# Altium PCB PCB1.PcbDoc
Units mil, origin at the board's own origin, x right, y up, seen from the top; angles counter-clockwise.
Board outline 6000 x 4000 mil, 2 copper layers (Top Layer, Bottom Layer); 66 components, 77 nets, 224 pads, 0 vias.
Unrouted connection lines stored in the file: 147.
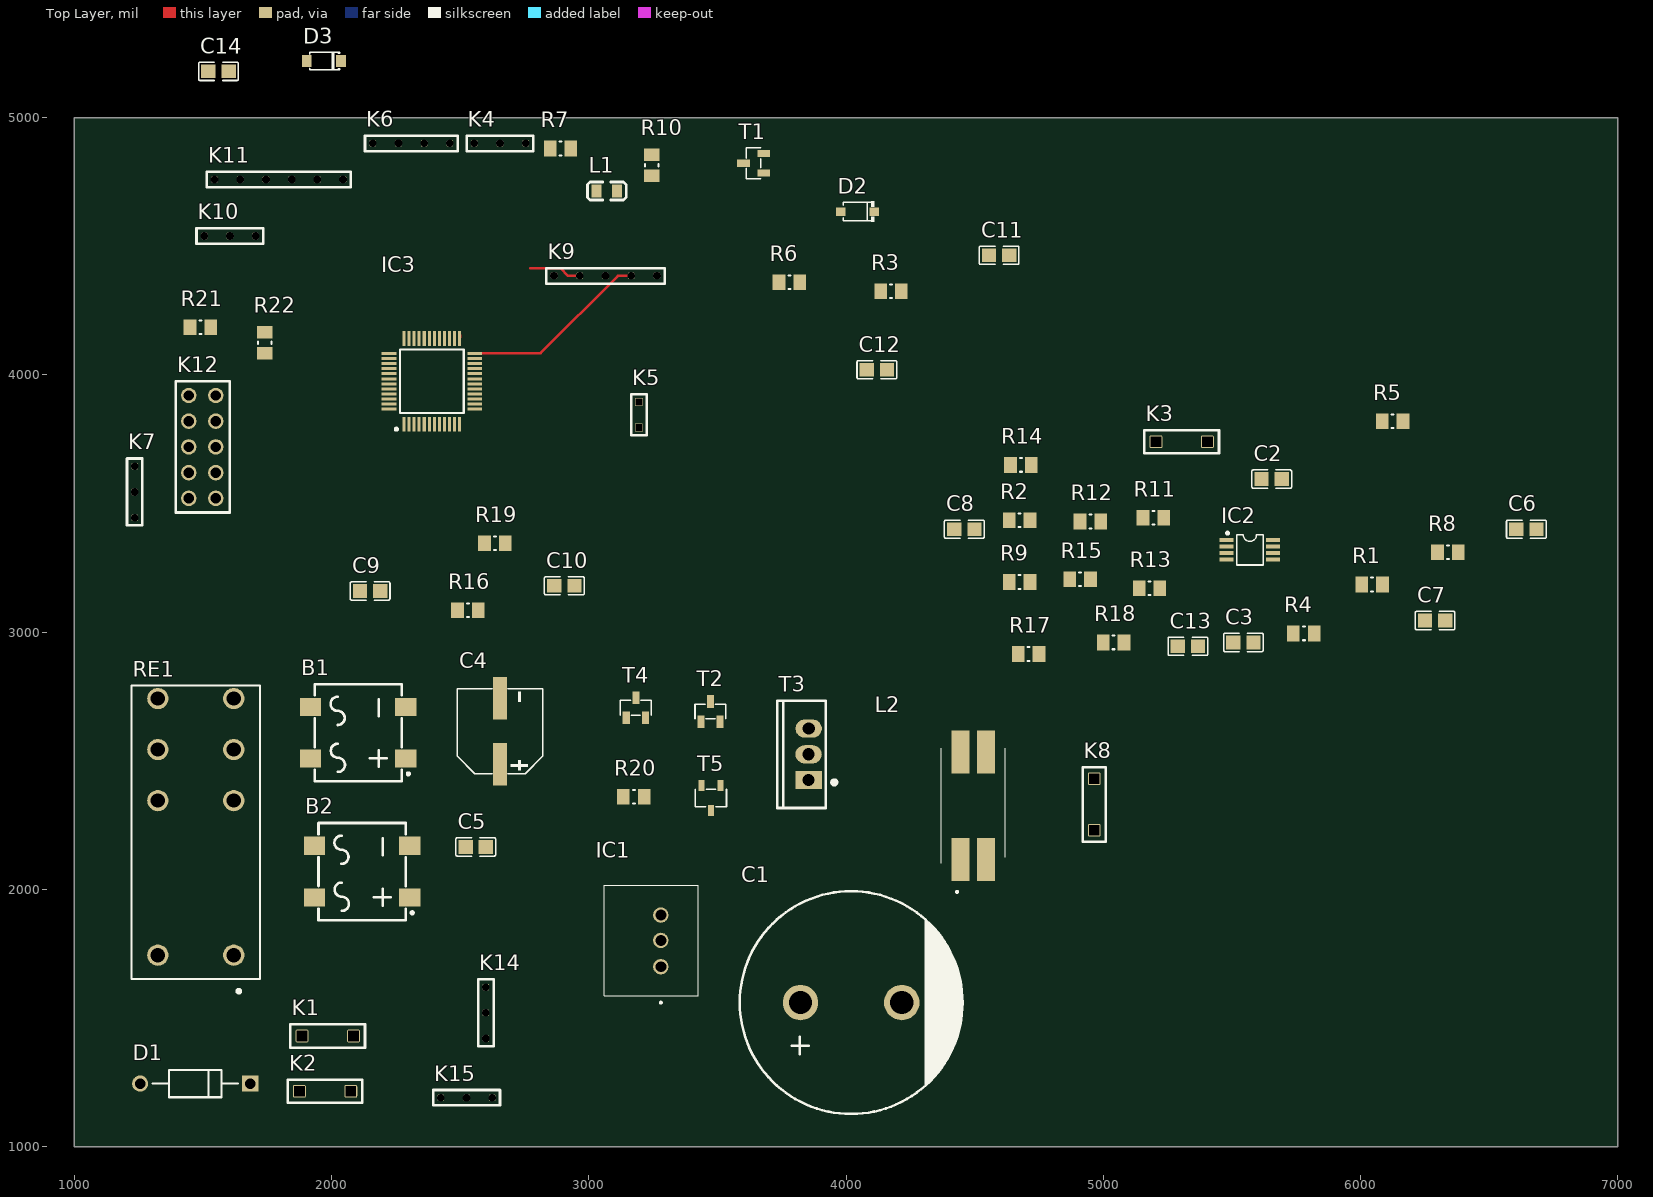
[diagram p0: Top Layer view]
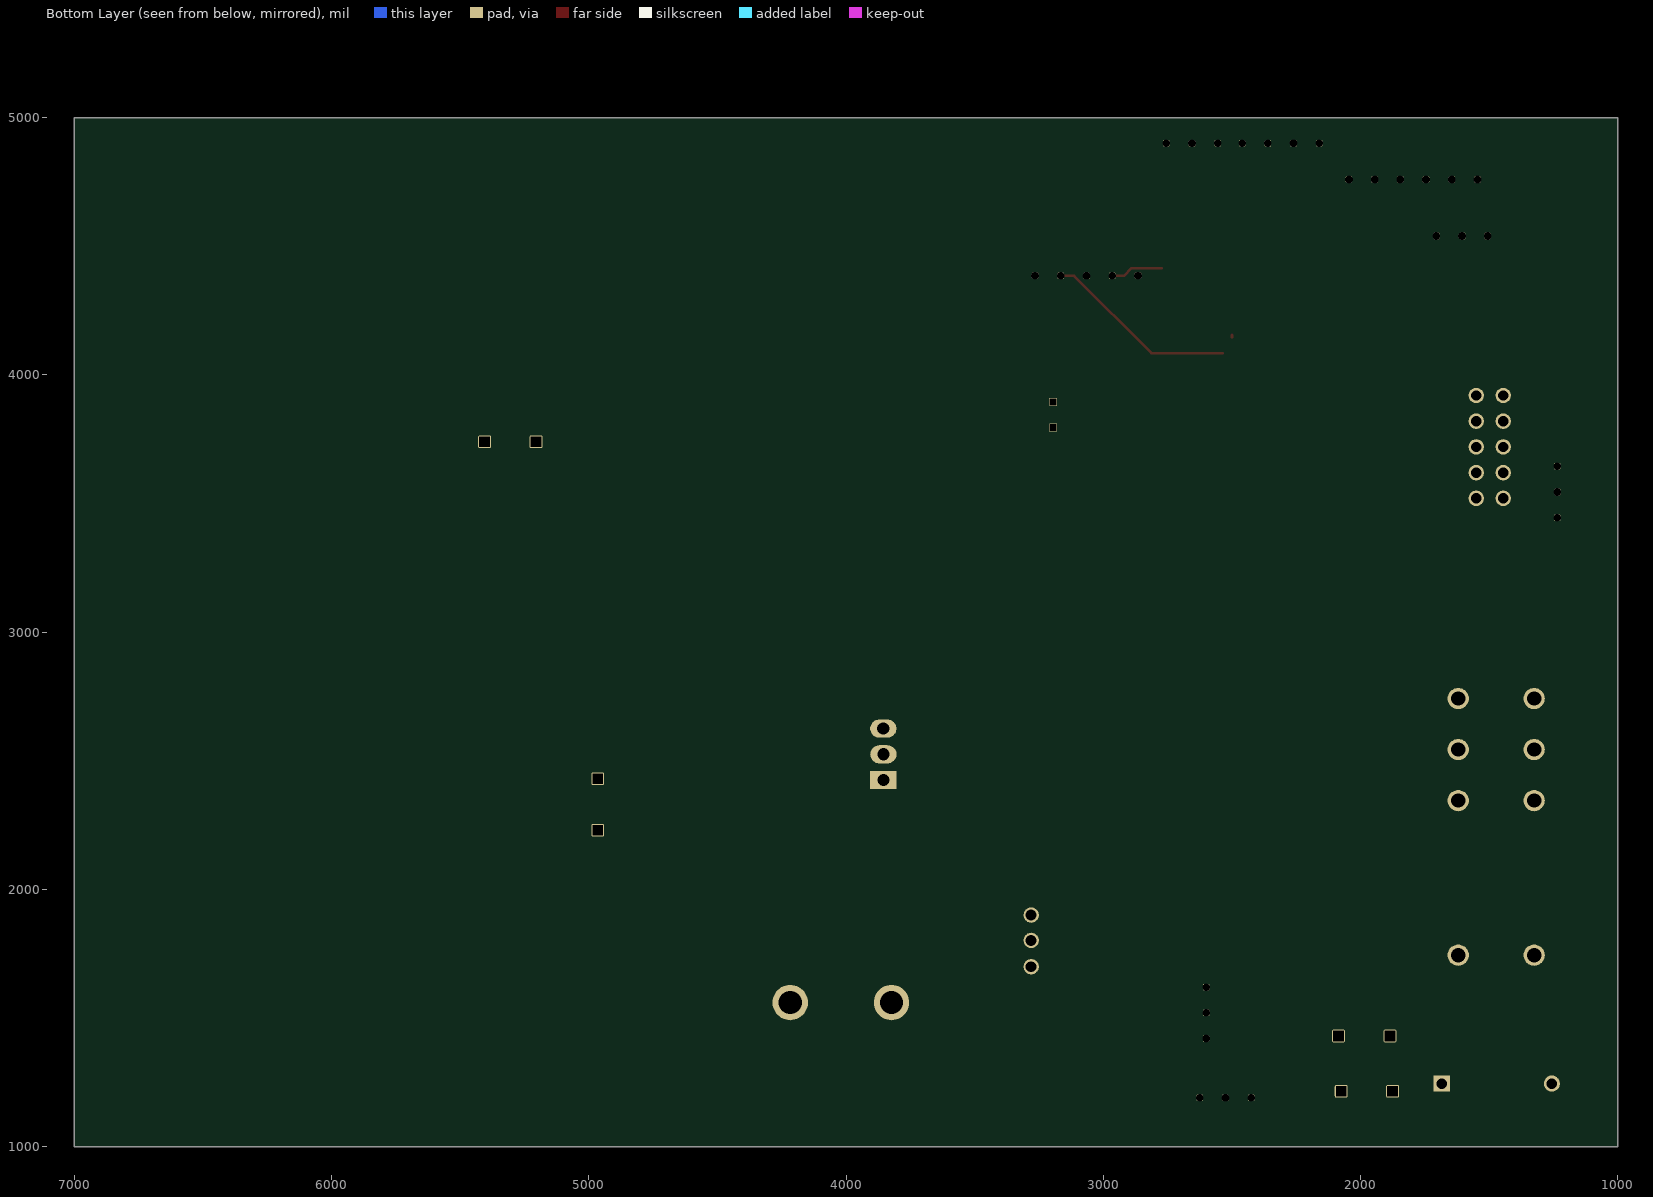
[diagram p1: Bottom Layer view, seen from below]

## Layer stack, top to bottom
Top Solder: solder mask 0.4, Solder Resist, Dk 3.5
Top Layer: signal copper 1.4
Dielectric 1: dielectric 12.6, FR-4, Dk 4.8
Bottom Layer: signal copper 1.4
Bottom Solder: solder mask 0.4, Solder Resist, Dk 3.5

## Board outline
1000,1000 7000,1000 7000,5000 1000,5000

## Design rules (kind name [scope] priority, off if disabled: settings)
Clearance [All] p1: gap=10 ignorepadtopadclearanceinfootprint=FALSE except(0: Arc-Hole Track-Hole SMDPad-Hole THPad-Hole Via-Hole Fill-Hole Poly-Hole Region-Hole Text-Hole)
PolygonConnect [All] p1: connectstyle=Relief reliefconductorwidth=10 reliefentries=4 polygonreliefangle="90 Angle" airgapwidth=10
RoutingVias [All] p1: holewidth=28 width=50 viastyle="Through Hole" minholewidth=28 minwidth=50 maxholewidth=28 maxwidth=50
SolderMaskExpansion [All] p1: expansion=4 istentingtop=FALSE
Width [All] p1: maxlimit=10 minlimit=10 preferedwidth=10
30 further rules are at their usual default settings.

## Classes and differential pairs
component class Voeding: B1 B2 C1 C4 C5 D1 D2 IC1 K1 K2 K14 K15 R3 R6 RE1
component class Thermokoppel: C6 C7 C12 C13 IC2 K3 R1 R2 R4 R5 R8 R9 R11 R12 R13 R14 R15
component class PWMSoldeerbout: K8 L2 R17 R18 R20 T2 T3 T4 T5
component class Microcontroller: C2 C3 C8 C9 C10 C11 C14 D3 IC3 K4 K5 K6 K7 K9 K10 K11 K12 L1 R7 R10 R16 R19 R21 R22 T1

## Components (designator, comment, footprint, x,y, rotation, side; value= is the part's Value field where it differs from the comment)
B1 "TTR8MF" "B1,2 Brug gelijkrichter" 2115,2605 r90 top
B2 "TTR8MF" "B1,2 Brug gelijkrichter" 2130,2065 r90 top
C1 "4700uF" "C1 4700uF" 4020,1560 r0 top
C2 "10uF" "C2,5,10 10uF" 5655,3595 r0 top
C3 "100nF" "C6,7,12,13 10nF" 5545,2960 r0 top
C4 "100uF" "C4 100uF" 2655,2615 r90 top
C5 "10uF" "C2,5,10 10uF" 2560.63,2165 r0 top
C6 "10nF" "C6,7,12,13 10nF" 6645,3400 r0 top
C7 "10nF" "C6,7,12,13 10nF" 6290,3045 r0 top
C8 "100nF" "C6,7,12,13 10nF" 4460,3400 r0 top
C9 "100nF" "C6,7,12,13 10nF" 2150,3160 r0 top
C10 "10uF" "C2,5,10 10uF" 2905,3180 r180 top
C11 "100nF" "C6,7,12,13 10nF" 4595,4465 r0 top
C12 "10nF" "C6,7,12,13 10nF" 4120,4020 r0 top
C13 "10nF" "C6,7,12,13 10nF" 5329.37,2945 r180 top
C14 "100nF" "C6,7,12,13 10nF" 1560.63,5180 r0 top
D1 "1N4007" FP-1N4007-MFG 1470,1245 r180 top value=15pF
D2 "" "D2 zener diode" 4045,4635 r180 top
D3 "1N4148" "D3 1N14148" 1970,5220 r180 top
IC1 "" "IC1 DC-DC converter" 3280,1699.21 r90 top
IC2 "" "IC2 opamps" 5570,3320 r270 top
IC3 "ATMEGA4809-AU" "IC3 ATMEGA4809-AU" 2390,3975 r90 top
K1 "" Terminal_2 1895,1365 r0 top
K2 "" Terminal_2 2065,1280 r180 top
K3 "" Terminal_2 5215,3675 r0 top
K4 "" PInHeader_3 2565,4835 r0 top
K5 "" PInHeader_2 3260,3805 r90 top
K6 "" PInHeader_4 2450,4965 r180 top
K7 "" PInHeader_3 1300,3455 r90 top
K8 "" Terminal_2 5030,2240 r90 top
K9 "" PInHeader_5 2875,4320 r0 top
K10 "" PInHeader_3 1695,4605 r180 top
K11 "K PinHeaer_6" PInHeader_6 2035,4825 r180 top
K12 "" BOxHeader_10 1460,3565 r90 top
K14 "" PInHeader_3 2665,1430 r90 top
K15 "" PInHeader_3 2435,1125 r0 top
L1 "10uH" "L2 SmoorSpoel" 3070,4715 r0 top
L2 "" "L1 Smoorspoel" 4495,2325 r0 top
R1 "18K" RESC2013X50X30ML20T20 6045,3185 r0 top
R2 "1M" RESC2013X50X30ML20T20 4675,3435 r0 top
R3 "68K" RESC2013X50X30ML20T20 4175,4325 r0 top
R4 "5K6" RESC2013X50X30ML20T20 5779.65,2995 r180 top
R5 "5K6" RESC2013X50X30ML20T20 6125,3820 r0 top
R6 "10K" RESC2013X50X30ML20T20 3780,4360 r180 top
R7 "10K" RESC2013X50X30ML20T20 2890,4880 r0 top
R8 "100" RESC2013X50X30ML20T20 6340,3310 r0 top
R9 "10M" RESC2013X50X30ML20T20 4674.65,3195 r0 top
R10 "4K7" RESC2013X50X30ML20T20 3245,4815 r90 top
R11 "18K" RESC2013X50X30ML20T20 5195,3445 r0 top
R12 "18K" RESC2013X50X30ML20T20 4950,3430 r0 top
R13 "5K6" RESC2013X50X30ML20T20 5180,3170 r0 top
R14 "5K6" RESC2013X50X30ML20T20 4679.65,3650 r0 top
R15 "100" RESC2013X50X30ML20T20 4910,3205 r0 top
R16 "4K7" RESC2013X50X30ML20T20 2530,3085 r0 top
R17 "4K7" RESC2013X50X30ML20T20 4710,2915 r0 top
R18 "100" RESC2013X50X30ML20T20 5040.35,2960 r180 top
R19 "10K" RESC2013X50X30ML20T20 2635,3345 r0 top
R20 "4K7" RESC2013X50X30ML20T20 3175,2360 r180 top
R21 "4K7" RESC2013X50X30ML20T20 1490,4185 r0 top
R22 "4K7" RESC2013X50X30ML20T20 1740,4125 r270 top
RE1 "" "RE1 Vermogen relais" 1472.36,1744.21 r90 top
T1 "BC847C" "T1,2,4 Bipolar Transistors" 3646.91,4819.61 r0 top
T2 "BC847" "T1,2,4 Bipolar Transistors" 3470,2685 r270 top
T3 "IRF9Z34NPBF" "T3 MOSFET-P" 3854.8,2525 r90 top
T4 "BC847" "T1,2,4 Bipolar Transistors" 3180,2700 r270 top
T5 "BC857" "T5 Bipolar Transistors" 3475,2355 r90 top

## Footprints (in the part's own frame and the unit in brackets; to place one, negate y for a bottom-side part, rotate by r counter-clockwise, add the part's x,y. Pads: shape width x height; smd on the part's side, far side on the other; paste and mask are expansions set on the pad)
"B1,2 Brug gelijkrichter" [mm]
  rect 1.8x2.1 smd: 1(-2.449,-4.411) 2(2.651,-4.411) 3(2.651,4.989) 4(-2.449,4.989)
  silkscreen extent -4.7,-4.79 4.9,4.59
BOxHeader_10 [mil]
  round 60 hole 40: 1(-45,-90) 2(-45,15) 3(55,-90) 4(55,15) 5(155,-90) 6(155,15) 7(255,-90) 8(255,15) 9(355,-90) 10(355,15)
  silkscreen extent -100,-145 410,65
"C1 4700uF" [mm] "CAP-TH_BD22.0-P10.00-D2.3-FD"
  round 3.5 hole 2.3: 1(-5,0) 2(5,0)
  silkscreen extent -11,-11 11,11
"C2,5,10 10uF" [mm] "C0805"
  rect 1.41x1.35 smd: 1(-1,0) 2(1,0)
  silkscreen extent -1.96,-0.9 1.96,0.9
"C4 100uF" [mm]
  rect 4.2x1.4 smd: 1(-3.267,0) 2(3.267,0)
  silkscreen extent -4.2,-4.23 4.2,4.23
"C6,7,12,13 10nF" [mm] "C0805"
  rect 1.41x1.35 smd: 1(-1,0) 2(1,0)
  silkscreen extent -1.96,-0.9 1.96,0.9
"D2 zener diode" [mm] "SOD-123_L2.7-W1.7-LS3.8-RD"
  rect 0.91x0.84 smd: 1(-1.655,0) 2(1.655,0)
  silkscreen extent -1.65,-1 1.43,1
"D3 1N14148" [mm] "SOD-123_L2.8-W1.8-LS3.7-RD"
  rect 0.95x1.15 smd: 1(-1.693,0) 2(1.693,0)
  silkscreen extent -1.58,-0.87 1.41,0.87
FP-1N4007-MFG [mm]
  rect 1.6x1.6 hole 1.05 paste-1000 mask+0: 1(-5.438,0)
  round 1.6 hole 1.05 paste-1000 mask+0: 2(5.438,0)
  silkscreen extent -4.24,-1.35 4.24,1.35, body extent -6.34,-1.45 6.34,1.45, height 0.25
"IC1 DC-DC converter" [mm] "OKI78SR515W36C"
  round 1.519 hole 1.08: 1(0,0) 2(2.6,0) 3(5.1,0)
  silkscreen extent -3.6,-3.7 8.05,5.6, body extent -10,-3.38 10,3.38, height 5.8
"IC2 opamps" [mil] "MSOP-8_L3.0-W3.0-P0.65-LS4.9-BL MCP6002-E/MS"
  rect 15.98x55 smd: 1(-38.39,-90.55) 2(-12.8,-90.55) 3(12.8,-90.55) 4(38.39,-90.55) 5(38.39,90.56) 6(12.8,90.56) 7(-12.8,90.55) 8(-38.39,90.55)
  silkscreen extent -70,-91 59,51
"IC3 ATMEGA4809-AU" [mm] "QFP50P900X900X120-48N"
  rect 1.475x0.3 smd: 1(-4.238,2.75) 2(-4.238,2.25) 3(-4.238,1.75) 4(-4.238,1.25) 5(-4.238,0.75) 6(-4.238,0.25) 7(-4.238,-0.25) 8(-4.238,-0.75) 9(-4.238,-1.25) 10(-4.238,-1.75) 11(-4.238,-2.25) 12(-4.238,-2.75) 25(4.238,-2.75) 26(4.238,-2.25) 27(4.238,-1.75) 28(4.238,-1.25) 29(4.238,-0.75) 30(4.238,-0.25) 31(4.238,0.25) 32(4.238,0.75) 33(4.238,1.25) 34(4.238,1.75) 35(4.238,2.25) 36(4.238,2.75)
  rect 0.3x1.475 smd: 13(-2.75,-4.238) 14(-2.25,-4.238) 15(-1.75,-4.238) 16(-1.25,-4.238) 17(-0.75,-4.238) 18(-0.25,-4.238) 19(0.25,-4.238) 20(0.75,-4.238) 21(1.25,-4.238) 22(1.75,-4.238) 23(2.25,-4.238) 24(2.75,-4.238) 37(2.75,4.238) 38(2.25,4.238) 39(1.75,4.238) 40(1.25,4.238) 41(0.75,4.238) 42(0.25,4.238) 43(-0.25,4.238) 44(-0.75,4.238) 45(-1.25,4.238) 46(-1.75,4.238) 47(-2.25,4.238) 48(-2.75,4.238)
  silkscreen extent -4.85,-3.15 3.15,3.62, body extent -10,-3.38 10,3.38, height 5.8
"L1 Smoorspoel" [mm]
  rect 1.78x4.27 smd: 1(-1.27,-5.305) 2(1.27,-5.305) 3(1.27,5.305) 4(-1.27,5.305)
  silkscreen extent -3.15,-8.6 3.15,5.69, body extent -10,-3.38 10,3.38, height 5.8
"L2 SmoorSpoel" [mm]
  rect 1x1.25 smd: 1(-1,0) 2(1,0)
  silkscreen extent -1.91,-0.89 1.91,0.89
PInHeader_2 [mil]
  rrect25% 32x32 hole 26 square: 1(-10,65) 2(90,65)
  silkscreen extent -40,35 120,95
PInHeader_3 [mil]
  rrect50% 26x26 hole 30: 1(-10,65) 2(90,65) 3(190,65)
  silkscreen extent -40,35 220,95
PInHeader_4 [mil]
  rrect50% 26x26 hole 30: 1(-10,65) 2(90,65) 3(190,65) 4(290,65)
  silkscreen extent -40,35 320,95
PInHeader_5 [mil]
  rrect50% 26x26 hole 30: 1(-10,65) 2(90,65) 3(190,65) 4(290,65) 5(390,65)
  silkscreen extent -40,35 420,95
PInHeader_6 [mil]
  rrect50% 26x26 hole 30: 1(-10,65) 2(90,65) 3(190,65) 4(290,65) 5(390,65) 6(490,65)
  silkscreen extent -40,35 520,95
"RE1 Vermogen relais" [mm] "RT42"
  round 2.1 hole 1.4: 1(0,-3.75) 2(15.26,-3.75) 3(20.3,-3.75) 4(25.34,-3.75) 5(25.34,3.75) 6(20.3,3.75) 7(15.26,3.75) 8(0,3.75)
  silkscreen extent -3.67,-6.35 26.65,6.35, body extent -10,-3.38 10,3.38, height 5.8
RESC2013X50X30ML20T20 [mm] "Chip Resistor, 2-Leads, Body 2.00x1.25mm, IPC Low Density"
  rect 1.25x1.55 smd: 1(-1.025,0) 2(1.025,0)
  silkscreen extent -0.1,-0.67 0.1,0.67, body extent -1.1,-0.72 1.1,0.72, height 0.5
"T1,2,4 Bipolar Transistors" [mm] "BC847C"
  rect 1.25x0.7 smd: 1(0.847,-0.872) 2(0.847,1.028) 3(-1.153,0.078)
  silkscreen extent -0.88,-1.45 0.57,1.6
"T3 MOSFET-P" [mm] "TO-220-3_L10.0-W4.5-P2.54-L"
  rect 1.8x2.6 hole 1.2: 1(-2.54,0.005)
  oval 1.8x2.6 hole 1.2: 2(0,0.005) 3(2.54,-0.005)
  silkscreen extent -5.3,-2.73 5.3,3.09
"T5 Bipolar Transistors" [mm] "SOT-23-3_L2.9-W1.6-P1.90-LS2.8-BR"
  rect 1.07x0.6 smd: 1(1.235,-0.95) 2(1.235,0.95) 3(-1.235,0)
  silkscreen extent -0.88,-1.54 0.88,1.54
Terminal_2 [mil]
  rrect25% 50x50 hole 40 square: 1(-10,65) 2(190,65)
  silkscreen extent -55,20 235,110

## Part data
B1 B2: library part "B1,2 Brug Gelijkrichter", BOM_JLCPCB Part Class="Extended Part", BOM_Manufacturer=MDD, BOM_Manufacturer Part=TTR8MF, BOM_Supplier=LCSC, BOM_Supplier Part=C712546, Contributor=LCSC, spicePre=D, spiceSymbolName=TTR8MF
C1: library part "C1 4700uF", BOM_JLCPCB Part Class="Extended Part", BOM_Manufacturer=CX(承兴), BOM_Manufacturer Part=KM478M050N35RR0VH2FP0, BOM_Supplier=LCSC, BOM_Supplier Part=C45662, nameAlias=Capacitance, spicePre=C, spiceSymbolName="4700uF 50V 22*35"
C2 C5 C10: library part "C2,5,10 10uF", BOM_JLCPCB Part Class="Basic Part", BOM_Manufacturer=muRata(村田), BOM_Manufacturer Part=GRM21BR61H106KE43L, BOM_Supplier=LCSC, BOM_Supplier Part=C440198, Contributor=LCSC, nameAlias=Capacitance, spicePre=C, spiceSymbolName=GRM21BR61H106KE43L
C3 C14: library part "C 100nF"
C4: library part "C4 100uF", BOM_JLCPCB Part Class="Extended Part", BOM_Manufacturer=Nichicon(尼吉康), BOM_Manufacturer Part=UWT1H101MNL1GS, BOM_Supplier=LCSC, BOM_Supplier Part=C445063, Contributor=LCSC, nameAlias=Capacitance, spicePre=C, spiceSymbolName=UWT1H101MNL1GS
C6 C7 C8 C9 C11 C12 C13: library part "C6,7,12,13 10nF", BOM_JLCPCB Part Class="Extended Part", BOM_Manufacturer=CCTC(三环), BOM_Manufacturer Part=TCC0805X7R103M500DT, BOM_Supplier=LCSC, BOM_Supplier Part=C376921, Contributor=LCSC, nameAlias=Capacitance, spicePre=C, spiceSymbolName=TCC0805X7R103M500DT
D1: library part zo_1N4007, "DIODE GEN PURP 1KV 1A DO204AL", Capacitance=15pF, Forward Current=1A, Manufacturer=Vishay, Manufacturer Part Number=1N4007-E3/54, Max Junction Temp=+150°C, Max Repetitive Reverse Voltage=1000V, Max Surge Forward Current=30A, Peak Reverse Current=30uA, Temperature="-50°C to +150°C", Temperature Range Low=-50°C, Automotive=No, Category=Diode, ComponentLink2Description=Datasheet, ComponentLink2URL=http://www.vishay.com/docs/88503/1n4001.pdf, Device Class L1="Discrete Semiconductors", Device Class L2=Diodes, Device Class L3="Rectifier Diodes", Digikey Description="DIODE GEN PURP 1KV 1A DO204AL", Height=2.7mm, Ipc Land Pattern Name=DIOPA1088W105L520D270, Lead Free=Yes, Mouser Description="Rectifiers Vr/1000V Io/1A", Octopart=https://octopart.com/1n4007-e3%2F54-vishay-39548207, Package=1N4007, RoHS=TRUE, Temperature Range High=+150°C
D2: library part "D2 zener diode", "BZT52C5V1_C1884555", BOM_JLCPCB Part Class="Extended Part", BOM_Manufacturer=YFW(佑风微), BOM_Manufacturer Part=BZT52C5V1, BOM_Supplier=LCSC, BOM_Supplier Part=C1884555, Contributor=LCSC, spicePre=D, spiceSymbolName=BZT52C5V1_C1884555
D3: library part "D3 1N14148", "1N4148W-C84367", BOM_JLCPCB Part Class="Extended Part", BOM_Manufacturer=MDD, BOM_Manufacturer Part=1N4148W, BOM_Supplier=LCSC, BOM_Supplier Part=C84367, spicePre=D, spiceSymbolName=1N4148W-C84367
IC1: library part "IC1 OKI-78SR-5_1.5-W36-C", "Non-Isolated DC/DC Converters 7.5W 24Vin 5Vout1 1.5A SIP Non-Iso", Manufacturer_Name="Murata Electronics", Manufacturer_Part_Number=OKI-78SR-5/1.5-W36-C, Mouser Part Number=580-OKI78SR5/1.5W36C, Datasheet Link=https://www.murata.com/products/productdata/8807037992990/oki-78sr.pdf?1583754815000, Geometry.Height=16.5mm, Mouser Price/Stock=https://www.mouser.co.uk/ProductDetail/Murata-Power-Solutions/OKI-78SR-5-1.5-W36-C?qs=uJpRT2lXVNXJP%252Bo08dQqJQ%3D%3D
IC2: library part "IC2 dual opamps", "IC2 dual opamps"
IC3: library part "IC3 ATMEGA4809-AU", "8-bit Microcontrollers - MCU 20MHz, 48KB, TQFP", Manufacturer_Name=Microchip, Mouser Part Number=556-ATMEGA4809-AU, Geometry.Height=1.2mm, Manufacturer_Part_Number=ATMEGA4809-AU, Mouser Price/Stock=https://www.mouser.co.uk/ProductDetail/Microchip-Technology-Atmel/ATMEGA4809-AU?qs=P1JMDcb91o4zLIorxO9tIg%3D%3D
K1 K2 K3 K8: library part "K Terminal_2"
K4 K7 K10 K14 K15: library part "K PinHeader_3"
K5: library part "K PinHeader_2"
K6: library part "K PinHeader_4"
K9: library part "K PinHeader_5"
K11: library part "K PinHeader_6"
K12: library part "K Boxheader_10"
L1: library part "L2 smoorspoel", BOM_JLCPCB Part Class="Extended Part", BOM_Manufacturer=KOHERelec(科或), BOM_Manufacturer Part=PMI201214S-100M, BOM_Supplier=LCSC, BOM_Supplier Part=C2922559, Contributor=LCSC, nameAlias=Inductance, spicePre=L, spiceSymbolName=PMI201214S-100M
L2: library part "L2 Common Mode Choke", "Common Mode Chokes / Filters 170ohms 100MHz 10A 1 Choke SMD", Manufacturer_Name="Laird Performance Materials", Manufacturer_Part_Number=CM2545X171R-10, Mouser Part Number=875-CM2545X171R-10, Datasheet Link=https://componentsearchengine.com/Datasheets/1/CM2545X171R-10.pdf, Geometry.Height=9.5mm, Mouser Price/Stock=https://www.mouser.co.uk/ProductDetail/Laird-Performance-Materials/CM2545X171R-10?qs=gHrF1kHvtHWa9UjYzLX7bQ%3D%3D
R1 R2 R3 R4 R5 R6 R7 R8 R9 R10 R11 R12 R13 R14 R15 R16 R17 R18 R19 R20 R21 R22: library part "R Resistor", Manufacturer="Vishay Dale", Part Number=CRCW08050000Z0EA
RE1: library part "RE1 Vermogen relais", "RT424005F  General Purpose Relays DPDT 8A 5VDC GEN PURPOSE RELAY", Manufacturer_Name="TE Connectivity", Manufacturer_Part_Number=RT424005F, Mouser Part Number=655-RT424005F, Datasheet Link=https://datasheet.datasheetarchive.com/originals/distributors/Datasheets_SAMA/2ef22a7a34dcc6453ddb52063c55ccaa.pdf, Mouser Price/Stock=https://www.mouser.co.uk/ProductDetail/TE-Connectivity-PB/RT424005F?qs=8wHch9UpSvaH%252B%252BmsSCbj0Q%3D%3D
T1: library part "T1,2,4 transisitors", "BC847C_C3027113", BOM_JLCPCB Part Class="Extended Part", BOM_Manufacturer=SALLTECH(萨瑞), BOM_Manufacturer Part=BC847C, BOM_Supplier=LCSC, BOM_Supplier Part=C3027113, Contributor=lcsc, link=https://atta.szlcsc.com/upload/public/pdf/source/20220824/287706FC7904CA05889B348536529CCD.pdf, spicePre=Q, spiceSymbolName=BC847C_C3027113
T2 T4: library part "T1,2,4 transisitors", "BC847C_C3027113", BOM_JLCPCB Part Class="Extended Part", BOM_Manufacturer=SALLTECH(萨瑞), BOM_Manufacturer Part=BC847C, BOM_Supplier=LCSC, BOM_Supplier Part=C3027113, Contributor=lcsc, link=https://atta.szlcsc.com/upload/public/pdf/source/20220824/287706FC7904CA05889B348536529CCD.pdf, spicePre=Q, spiceSymbolName=BC847C_C3027113
T3: library part "T3 MOSFET-P", BOM_JLCPCB Part Class="Extended Part", BOM_Manufacturer=Infineon(英飞凌), BOM_Manufacturer Part=IRF9Z34NPBF, BOM_Supplier=LCSC, BOM_Supplier Part=C500523, Contributor=LCSC, spicePre=Q, spiceSymbolName=IRF9Z34NPBF
T5: library part "T5 Bipolar Transistor", "BC857 3G", BOM_JLCPCB Part Class="Extended Part", BOM_Manufacturer=CJ(江苏长电/长晶), BOM_Manufacturer Part=BC857, BOM_Supplier=LCSC, BOM_Supplier Part=C2139, spicePre=Q, spiceSymbolName="BC857 3G"

## Nets (pads, with @x,y where several pads share a name; then routed paths per layer and width w, separated by ;. In a path a pad name is that pad's centre, name@x,y a point inside that pad or via, vN(x,y) a via of type N, cw(c..) or ccw(c..) an arc to the next point about the centre after c; other vN are vias at no path point)
+5: C2.2 C3.2 C5.2 C8.1 C9.1 C10.2 D3.1 IC1.3 IC2.8 IC3.14 IC3.42 K6.4 K7.1 K11.2 K12.10 L1.2 R2.2 R16.2 R21.1 R22.1
GND: B1.2 B2.2 C1.2 C2.1 C3.1 C4.2 C5.1 C6.1 C7.1 C8.2 C9.2 C10.1 C11.2 C12.1 C13.1 D2.2 IC1.2 IC2.4 IC3.15 IC3.29 IC3.43 K3.2 K6.1 K7.3 K10.3 K11.6 K12.1 K14.3 K15.1 L2.1 R6.1 R8.1 R9.1 R10.2 R15.1 R20.1 T1.2 T4.2 T5.3
NetB1_1: B1.1 K15.2
NetB1_3: B1.3 K2.1 RE1.5
NetB1_4: B1.4 B2.3 K1.2 RE1.3
NetB2_1: B2.1 K14.2
NetB2_4: B2.4 K1.1 RE1.6
NetC4_1: C4.1 IC1.1 K14.1
NetC6_2: C6.2 IC3.20 R5.1
NetC7_2: C7.2 IC2.5 R4.1
NetC11_1: C11.1 IC3.28 L1.1
NetC12_2: C12.2 IC3.21 R14.1
NetC13_2: C13.2 IC2.3 R13.2
NetC14_1: C14.1 K11.3
NetC14_2: C14.2 D3.2 IC3.40
NetC17_1: 
NetC18_1: 
NetC19_1: 
NetD1_1: D1.1 RE1.1
NetD1_2: D1.2 RE1.8
NetD2_1: D2.1 IC3.22 R3.1 R6.2
NetIC2_1: IC2.1 R11.2 R14.2
NetIC2_2: IC2.2 R12.2 R15.2
NetIC2_6: IC2.6 R1.1 R8.2
NetIC2_7: IC2.7 R1.2 R5.2
NetIC3_1: IC3.1 K12.6
NetIC3_2: IC3.2 K12.4
NetIC3_3: IC3.3 K12.2
NetIC3_10: IC3.10 R19.1
NetIC3_11: IC3.11 K7.2 R16.1
NetIC3_16: IC3.16 K5.1
NetIC3_17: IC3.17 K5.2
NetIC3_23: IC3.23 K9.5
NetIC3_24: IC3.24 K9.4 | length 754.5
  Top Layer w10: IC3.24@2535,4084.49 2812.77,4084.49 3113.28,4385 K9.4
NetIC3_25: IC3.25 K9.3 | length 9.5
  Top Layer w10: IC3.25@2499.49,4145.51 IC3.25@2499.49,4155
NetIC3_26: IC3.26 K9.2 | length 204.1
  Top Layer w10: 2773.35,4415 2889.84,4415 2919.84,4385 K9.2
NetIC3_27: IC3.27 K9.1
NetIC3_30: IC3.30 R7.1
NetIC3_31: IC3.31 K4.3
NetIC3_32: IC3.32 K4.2
NetIC3_33: IC3.33 K4.1
NetIC3_34: IC3.34 K6.2
NetIC3_35: IC3.35 K6.3
NetIC3_38: IC3.38 K11.1
NetIC3_39: IC3.39 K11.4
NetIC3_41: IC3.41 K11.5
NetIC3_44: IC3.44 K10.1
NetIC3_45: IC3.45 K10.2
NetIC3_46: IC3.46 K12.7 R22.2
NetIC3_47: IC3.47 K12.9 R21.2
NetIC3_48: IC3.48 K12.8
NetIC4_2: 
NetIC4_3: 
NetIC4_4: 
NetIC4_5: 
NetIC4_6: 
NetIC4_7: 
NetIC4_8: 
NetIC4_9: 
NetIC4_12: 
NetIC4_13: 
NetIC4_14: 
NetIC4_15: 
NetIC4_19: 
NetIC4_20: 
NetK2_2: K2.2 RE1.4 RE1.7
NetK3_1: K3.1 R2.1 R4.2 R9.2 R13.1
NetK8_1: K8.1 L2.2
NetK8_2: K8.2 L2.3
NetL2_4: L2.4 T3.3
NetR7_2: R7.2 R10.1 T1.1
NetR11_1: R11.1 R12.1
NetR17_1: R17.1 T2.1 T4.3 T5.1
NetR18_1: R18.1 T3.1
NetR18_2: R18.2 T2.2 T5.2
NetR19_2: R19.2 R20.2 T4.1
VIN: C1.1 K15.3 R3.2 R17.2 T2.3 T3.2
pads on no net: IC3.4 IC3.5 IC3.6 IC3.7 IC3.8 IC3.9 IC3.12 IC3.13 IC3.18 IC3.19 IC3.36 IC3.37 K12.3 K12.5 RE1.2 T1.3